# Altium PCB PCB 整版图 AD格式 方便设计底板.PcbDoc
Units mm, origin at the board's own origin, x right, y up, seen from the top; angles counter-clockwise.
Board outline 154.2 x 78.92 mm, 4 copper layers (TopLayer, Signal Layer 1, Signal Layer 2, BottomLayer), stack 0.143 mm thick; 2 components, 158 nets, 96 pads, 0 vias.
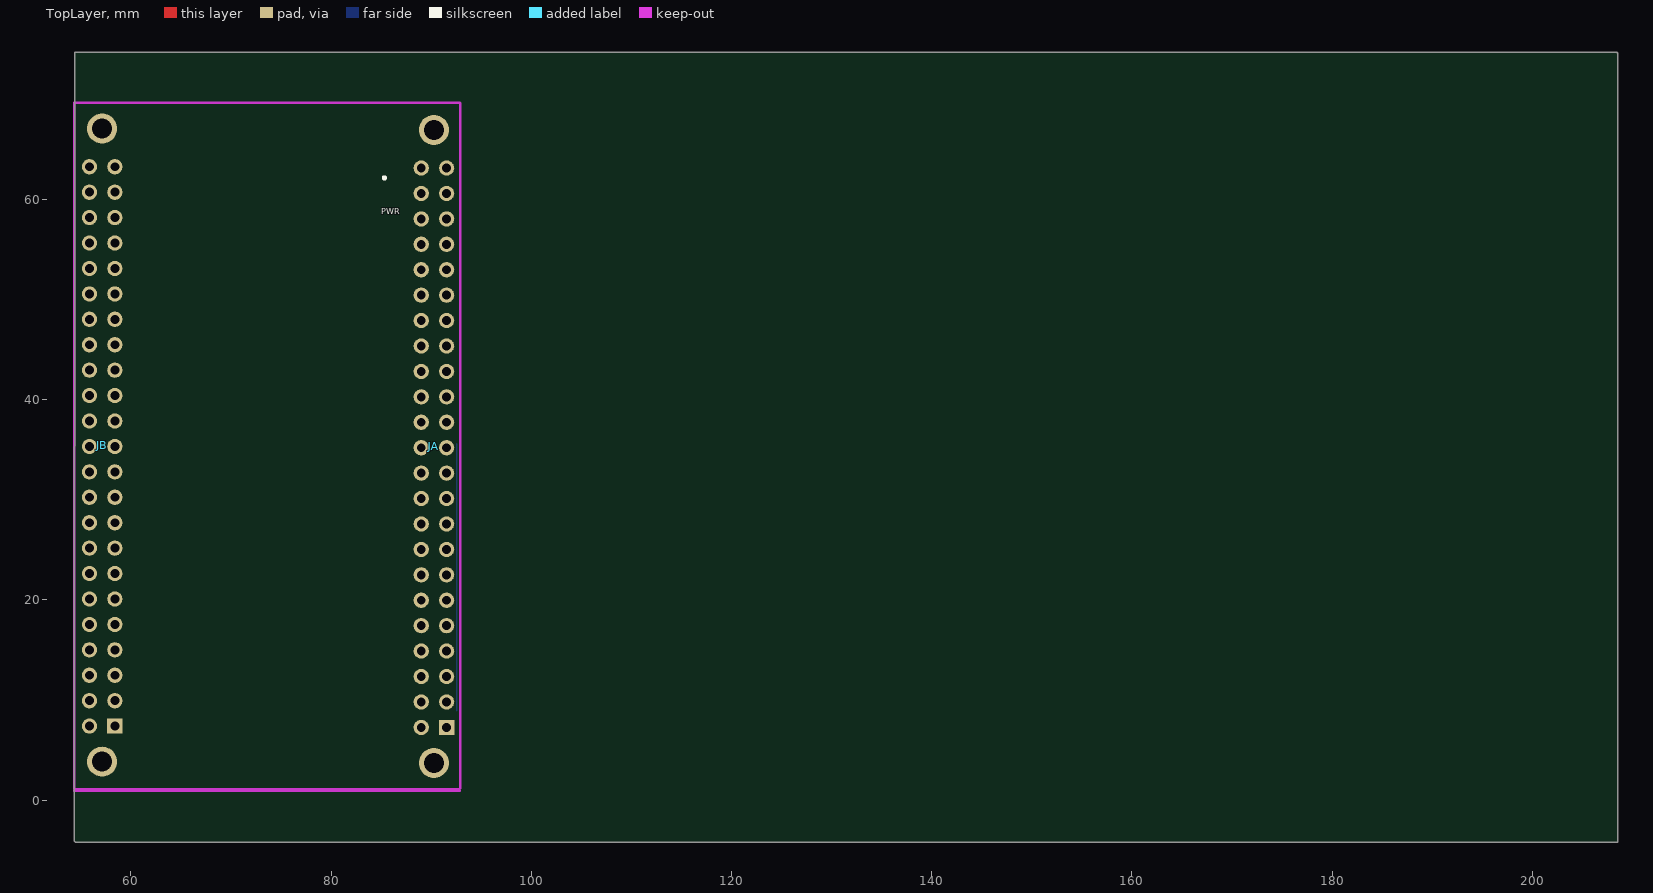
[diagram p0: TopLayer view]
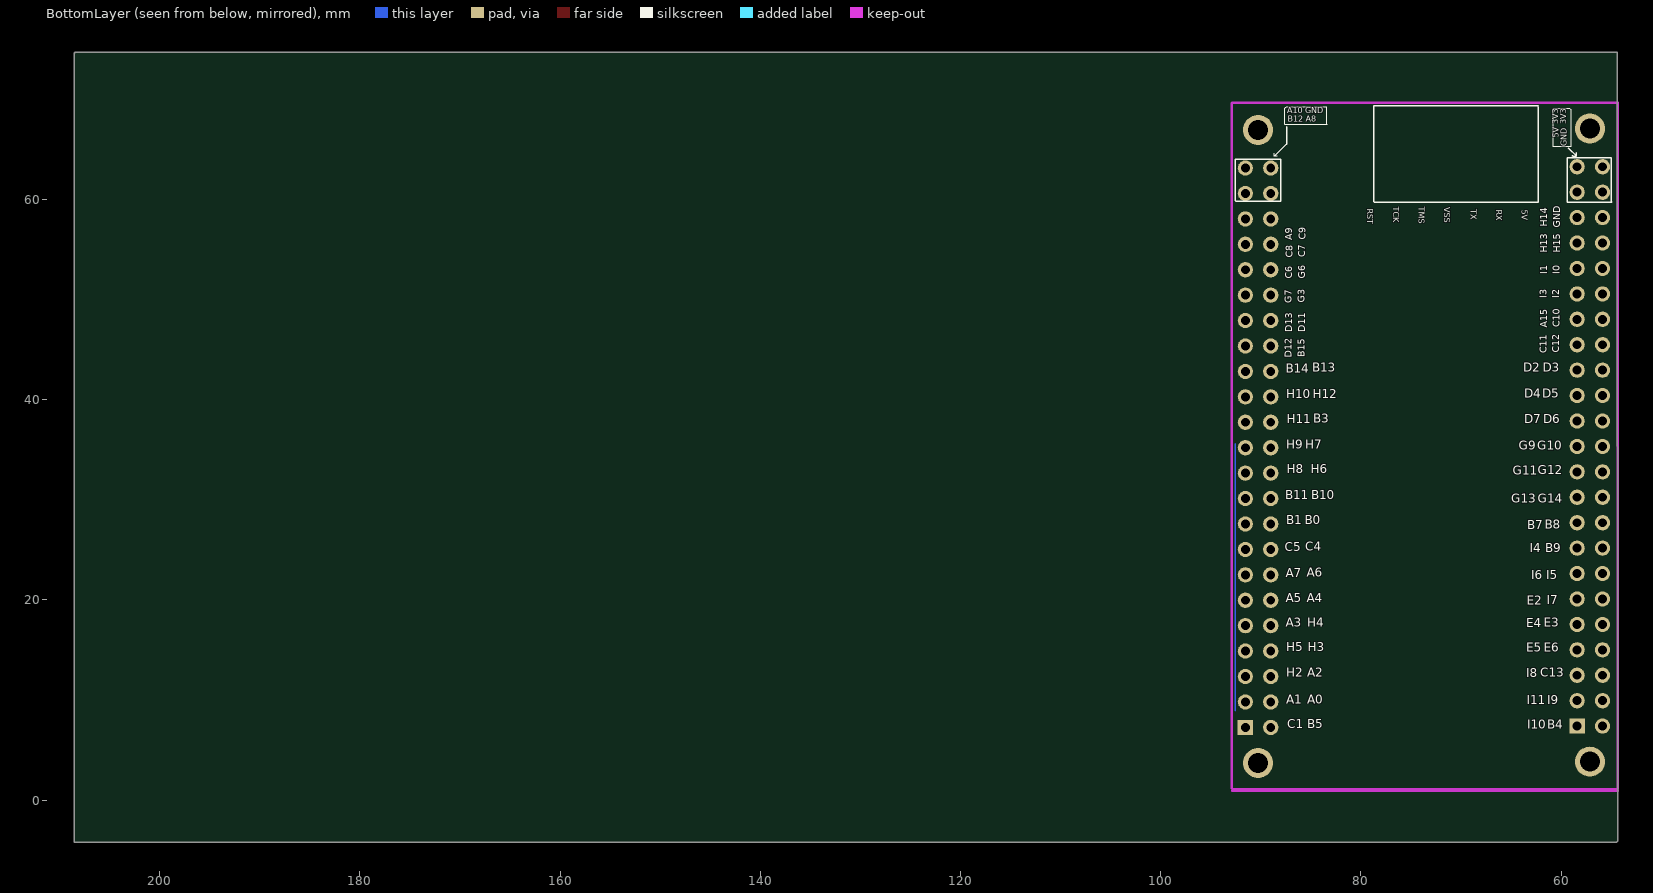
[diagram p1: BottomLayer view, seen from below]

## Layer stack, top to bottom
TopLayer: signal copper 0.0356
Signal Layer 1: signal copper 0.036
Signal Layer 2: signal copper 0.036
BottomLayer: signal copper 0.0356

## Board outline
54.407,74.705 208.429,74.705 208.534,74.6 208.509,74.574 208.509,-4.216 54.462,-4.216 54.335,-4.089

## Design rules (kind name [scope] priority, off if disabled: settings)
Clearance Clearance_1 [All] p1: gap=0.15
ComponentClearance [All] p1 off: gap=0.254 collisioncheckmode=3 verticalgap=0.254 showdistances=FALSE
FabricationTestPointUsage TestPointUsage [All] p1: valid=0 allowmultiple=FALSE
FabricationTestpoint Testpoint [(IsPad And (OnTopLayer Or OnBottomLayer))] p1: side=3 testpointundercomponent=TRUE minsize=1.016 maxsize=2.54 preferedsize=1.524 minholesize=0.508 maxholesize=1.016 preferedholesize=0.813 testpointgrid=0.025 allowsidetop=TRUE allowsidebottom=TRUE usegrid=TRUE gridtolerance=0
MatchedLengths [InNetClass('addres') vs InNetClass('All Nets')] p1: tolerance=5 checknetsindiffpair=TRUE checkdiffpairvsdiffpair=TRUE checkothers=TRUE
PolygonConnect [All] p1: connectstyle=Direct reliefconductorwidth=0.254 reliefentries=4 polygonreliefangle="90 Angle"
RoomDefinition 176v2 [InComponentClass('176v2')] p1: confinementstyle=ConfineIn formatcopy=TRUE lockcomponents=FALSE outline -1158.447,-1371.233 -1107.647,-1371.233 -1107.647,-1345.833 -1158.447,-1345.833
RoutingVias [All] p1: holewidth=0.3 width=0.6 viastyle="Through Hole" minholewidth=0 minwidth=0 maxholewidth=0.711 maxwidth=1.27
SilkscreenOverComponentPads SilkToSolderMaskClearance [IsPad] p1: minsilkscreentomaskgap=0.254
SolderMaskExpansion [All] p1: expansion=0.102
Width [All] p1: maxlimit=1 minlimit=2539.975 preferedwidth=0.3 toplayer_minwidth=0 midlayer1_minwidth=0 midlayer2_minwidth=0 bottomlayer_minwidth=0 minimp=50.000000 maximp=50.000000 favimp=50.000000
24 further rules are at their usual default settings.

## Components (designator, comment, footprint, x,y, rotation, side; value= is the part's Value field where it differs from the comment)
JA "IDC46P" PZ2.54-2X23P#1 91.538,7.257 r90 top locked
JB "IDC46P" PZ2.54-2X23P#2 58.391,7.384 r90 top locked

## Footprints (in the part's own frame and the unit in brackets; to place one, negate y for a bottom-side part, rotate by r counter-clockwise, add the part's x,y. Pads: shape width x height; smd on the part's side, far side on the other; paste and mask are expansions set on the pad)
PZ2.54-2X23P#1 [mil]
  round 118.11 hole 78.74: 0(2349.99,50.01) 0_1(-140,50)
  rect 60x60 hole 35: 1(0,0)
  round 60 hole 35: 2(0.01,100.01) 3(100,0) 4(100.01,100.01) 5(200,0) 6(200.01,100.01) 7(300,0) 8(300.01,100.01) 9(400,0) 10(400.01,100.01) 11(500,0) 12(500.01,100.01) 13(600,0) 14(600.01,100.01) 15(700,0) 16(700.01,100.01) 17(800,0) 18(800.01,100.01) 19(900,0) 20(900.01,100.01) 21(1000,0) 22(1000.01,100.01) 23(1100,0) 24(1100.01,100.01) 25(1200,0) 26(1200.01,100.01) 27(1300,0) 28(1300.01,100.01) 29(1400,0) 30(1400.01,100.01) 31(1500,0) 32(1500.01,100.01) 33(1600,0) 34(1600.01,100.01) 35(1699.99,0) 36(1699.99,100.01) 37(1799.99,0) 38(1799.99,100.01) 39(1899.99,0) 40(1899.99,100.01) 41(1999.99,0) 42(1999.99,100.01) 43(2099.99,0) 44(2099.99,100.01) 45(2199.99,0) 46(2199.99,100.01)
  body extent -50,-50 2264,150, height 336
PZ2.54-2X23P#2 [mil]
  round 118.11 hole 78.74: 0(-140,50) 0_1(2349.99,50.01)
  rect 60x60 hole 35: 1(0,0)
  round 60 hole 35: 2(0.01,100.01) 3(100,0) 4(100.01,100.01) 5(200,0) 6(200.01,100.01) 7(300,0) 8(300.01,100.01) 9(400,0) 10(400.01,100.01) 11(500,0) 12(500.01,100.01) 13(600,0) 14(600.01,100.01) 15(700,0) 16(700.01,100.01) 17(800,0) 18(800.01,100.01) 19(900,0) 20(900.01,100.01) 21(1000,0) 22(1000.01,100.01) 23(1100,0) 24(1100.01,100.01) 25(1200,0) 26(1200.01,100.01) 27(1300,0) 28(1300.01,100.01) 29(1400,0) 30(1400.01,100.01) 31(1500,0) 32(1500.01,100.01) 33(1600,0) 34(1600.01,100.01) 35(1699.99,0) 36(1699.99,100.01) 37(1799.99,0) 38(1799.99,100.01) 39(1899.99,0) 40(1899.99,100.01) 41(1999.99,0) 42(1999.99,100.01) 43(2099.99,0) 44(2099.99,100.01) 45(2199.99,0) 46(2199.99,100.01)
  body extent -50,-50 2264,150, height 336

## Nets (pads, with @x,y where several pads share a name; then routed paths per layer and width w, separated by ;. In a path a pad name is that pad's centre, name@x,y a point inside that pad or via, vN(x,y) a via of type N, cw(c..) or ccw(c..) an arc to the next point about the centre after c; other vN are vias at no path point)
3.3V: 
5V: 
5VIN: 
A0: 
A1: 
A2: 
A3: 
A4: 
A5: 
A6: 
A7: 
A8: 
A9: 
A10: 
A11: 
A12: 
B3: 
B4: 
B5: 
B6: 
B7: 
BA0: 
BA1: 
BAT+: 
BL0: 
BL1: 
BOOT0: 
CAS: 
CD: 
CKE: 
CLK: 
CS: 
CS1: 
D0: 
D1: 
D2: 
D3: 
D4: 
D5: 
D6: 
D7: 
D8: 
D9: 
D10: 
D11: 
D12: 
D13: 
D14: 
D15: 
DCMI_D0: 
DCMI_D1: 
DCMI_D2: 
DCMI_D3: 
DCMI_D4: 
DCMI_D5: 
DCMI_D6: 
DCMI_D7: 
DCMI_HREF: 
DCMI_PCK: 
DCMI_PWDN: 
DCMI_SCL: 
DCMI_SDA: 
DCMI_VSY: 
DM: 
DP: 
G2: 
G3: 
G4: 
G5: 
G6: 
G7: 
GND: 
JTCK: 
JTMS: 
"L BL": 
"L CLK": 
"L DE": 
"L HS": 
"L VS": 
LCD-BL: 
LCD-CS: 
LCD-DC: 
LCD-SCL-SCK: 
LCD-SDA-MOSI: 
LEDEN: 
MISO: 
MOSI: 
NetC21A_2: 
NetC24_1: 
NetC25_1: 
NetC26_1: 
NetC27_1: 
NetC27A_1: 
NetD1_1: 
NetLED3_1: 
NetLED_1: 
NetQ1_1: 
NetQ2_3: 
NetR7_2: 
NetR15_2: 
PA0: 
PA1: 
PA2: 
PA3: 
PA7: 
PA8: 
PA9: 
PA10: 
PA15: 
PB0: 
PB1: 
PB2: 
PB6: 
PB10: 
PB11: 
PB14: 
PC0: 
PC1: 
PC4: 
PC5: 
PC10: 
PC12: 
PC13: 
PC15: 
PD2: 
PD4: 
PD5: 
PD6: 
PD7: 
PD11: 
PD12: 
PD13: 
PE2: 
PE3: 
PE4: 
PE5: 
PE6: 
PF7: 
PF11: 
PG3: 
PG6: 
PG9: 
PG10: 
PG13: 
PH3: 
PH4: 
PH5: 
PH6: 
PH7: 
PH9: 
PH10: 
PH11: 
PH12: 
PI3: 
PI4: 
PI8: 
PI11: 
RST: 
pads on no net: JA.0 JA.0_1 JA.1 JA.2 JA.3 JA.4 JA.5 JA.6 JA.7 JA.8 JA.9 JA.10 JA.11 JA.12 JA.13 JA.14 JA.15 JA.16 JA.17 JA.18 JA.19 JA.20 JA.21 JA.22 JA.23 JA.24 JA.25 JA.26 JA.27 JA.28 JA.29 JA.30 JA.31 JA.32 JA.33 JA.34 JA.35 JA.36 JA.37 JA.38 JA.39 JA.40 JA.41 JA.42 JA.43 JA.44 JA.45 JA.46 JB.0 JB.0_1 JB.1 JB.2 JB.3 JB.4 JB.5 JB.6 JB.7 JB.8 JB.9 JB.10 JB.11 JB.12 JB.13 JB.14 JB.15 JB.16 JB.17 JB.18 JB.19 JB.20 JB.21 JB.22 JB.23 JB.24 JB.25 JB.26 JB.27 JB.28 JB.29 JB.30 JB.31 JB.32 JB.33 JB.34 JB.35 JB.36 JB.37 JB.38 JB.39 JB.40 JB.41 JB.42 JB.43 JB.44 JB.45 JB.46
copper on no net: | length 26.7
  BottomLayer w0.15: 92.525,8.929 92.525,35.606

## Keep-outs
KeepOutLayer:
  lines w0.1: 92.862,1.114 92.862,69.668 ; 92.862,1.118 92.862,69.672
  lines w0.127: 54.352,42.646 54.352,69.646 ; 92.909,42.646 92.909,69.646
  lines w0.2: 54.335,0.889 92.835,0.889 ; 54.335,0.94 92.862,0.94 ; 54.335,1.121 54.335,69.621 92.835,69.621 ; 54.335,69.588 54.335,1.114 92.862,1.114 ; 54.335,69.592 54.335,1.118 ; 54.335,69.672 92.835,69.672 ; 54.356,0.889 92.856,0.889 ; 54.356,0.914 92.856,0.914 ; 54.356,0.944 92.856,0.944 ; 54.356,1.143 54.356,69.643 92.856,69.643 ; 54.356,1.147 54.356,69.647 92.856,69.647 ; 54.356,69.698 92.856,69.698 ; 92.835,69.618 54.335,69.618 54.335,1.118 ; 92.862,1.118 54.335,1.118 ; 92.892,1.114 92.892,69.588 ; 92.892,69.618 92.892,1.118 ; 92.913,1.143 92.913,69.643 ; 92.892,1.118 92.892,69.592 92.892,1.118 ; 92.892,1.121 92.892,69.621 92.892,1.121 ; 92.913,1.147 92.913,69.647 92.913,1.147

## Silkscreen, mask and mechanical layers (free items; w line width, h text height)
TopOverlay:
  circle w0.254: c85.319,62.154 r0.13
  text "PWR" at 84.988,58.315 h1
BottomOverlay:
  lines w0.1: 58.979,68.957 58.979,65.274 60.782,65.274 60.782,69.084 59.131,69.084 59.004,68.957 59.004,68.932 ; 83.388,69.211 83.388,67.509 83.414,67.484 87.528,67.484 87.579,67.535 87.579,69.11 ; 83.414,69.211 87.478,69.211 87.579,69.11 ; 87.427,67.281 87.427,65.579 88.621,64.385 ; 87.554,69.135 87.579,69.11 ; 88.341,64.309 88.595,64.309 88.621,64.334 88.646,64.334 88.646,64.614 ; 87.986,59.864 87.986,63.699 87.986,64.03 92.558,64.03 92.532,64.004 92.532,59.864 92.507,59.839 88.011,59.839 87.986,59.864
  lines w0.15: 54.94,59.712 54.966,59.737 54.966,64.182 54.991,64.157 59.36,64.157 59.36,59.712 55.016,59.712 ; 58.471,64.665 58.471,64.334 ; 58.877,64.36 58.852,64.334 58.471,64.334 ; 59.258,65.122 58.471,64.334 ; 62.255,69.342 78.689,69.342 78.689,59.766 78.638,59.715 62.281,59.715 ; 62.281,59.766 62.281,69.266 ; 87.427,67.281 87.427,65.528 88.57,64.385 88.57,64.36 ; 87.986,64.03 92.507,64.03 92.532,64.004 92.532,59.889 92.481,59.839 88.011,59.839 87.986,59.813 87.986,63.903 88.011,63.928 88.011,64.004
  text "A10" at 87.357,68.43 h1
  text "GND" at 85.549,68.405 h1
  text "A8" at 85.523,67.567 h1
  text "B12" at 87.301,67.567 h1
  text "3V3" at 59.265,67.533 h1 r270
  text "3V3" at 60.078,67.533 h1 r270
  text "5V" at 60.027,66.162 h1 r270
  text "GND" at 59.24,65.298 h1 r270
  text "TCK" at 76.987,59.28 h1 r90
  text "TMS" at 74.397,59.254 h1 r90
  text "VSS" at 71.857,59.229 h1 r90
  text "RST" at 79.553,59.077 h1 r90
  text "TX" at 69.215,59.026 h1 r90
  text "5V" at 64.11,58.975 h1 r90
  text "RX" at 66.675,58.975 h1 r90
  text "H14" at 61.119,57.272 h1.2 r270
  text "GND" at 59.849,57.195 h1.2 r270
  text "C9" at 85.249,55.976 h1.2 r270
  text "A9" at 86.596,55.9 h1.2 r270
  text "H15" at 59.849,54.681 h1.2 r270
  text "H13" at 61.119,54.655 h1.2 r270
  text "C7" at 85.3,54.224 h1.2 r270
  text "C8" at 86.57,54.198 h1.2 r270
  text "I0" at 59.875,52.547 h1.2 r270
  text "I1" at 61.145,52.522 h1.2 r270
  text "G6" at 85.326,52.09 h1.2 r270
  text "C6" at 86.596,52.065 h1.2 r270
  text "I2" at 59.926,50.134 h1.2 r270
  text "I3" at 61.196,50.109 h1.2 r270
  text "G3" at 85.376,49.677 h1.2 r270
  text "G7" at 86.646,49.652 h1.2 r270
  text "C10" at 59.875,47.213 h1.2 r270
  text "A15" at 61.145,47.188 h1.2 r270
  text "D11" at 85.326,46.756 h1.2 r270
  text "D13" at 86.596,46.731 h1.2 r270
  text "C12" at 59.926,44.673 h1.2 r270
  text "C11" at 61.196,44.648 h1.2 r270
  text "B15" at 85.376,44.216 h1.2 r270
  text "D12" at 86.646,44.191 h1.2 r270
  text "D2" at 63.756,42.486 h1.5
  text "D3" at 61.849,42.461 h1.5
  text "B13" at 84.836,42.461 h1.5
  text "B14" at 87.505,42.41 h1.5
  text "D5" at 61.901,39.896 h1.5
  text "D4" at 63.679,39.87 h1.5
  text "H12" at 84.787,39.845 h1.5
  text "H10" at 87.454,39.819 h1.5
  text "B3" at 84.761,37.381 h1.5
  text "H11" at 87.403,37.356 h1.5
  text "D6" at 61.8,37.33 h1.5
  text "D7" at 63.679,37.33 h1.5
  text "H7" at 85.574,34.79 h1.5
  text "H9" at 87.428,34.776 h1.5
  text "G10" at 62.384,34.714 h1.5
  text "G9" at 64.238,34.7 h1.5
  text "H6" at 85.015,32.352 h1.5
  text "H8" at 87.427,32.352 h1.5
  text "G12" at 62.333,32.225 h1.5
  text "G11" at 64.846,32.174 h1.5
  text "B10" at 84.939,29.736 h1.5
  text "B11" at 87.555,29.736 h1.5
  text "G14" at 62.333,29.405 h1.5
  text "G13" at 64.975,29.38 h1.5
  text "B0" at 85.6,27.246 h1.5
  text "B1" at 87.454,27.246 h1.5
  text "B8" at 61.622,26.789 h1.5
  text "B7" at 63.4,26.738 h1.5
  text "C4" at 85.574,24.592 h1.5
  text "C5" at 87.583,24.533 h1.5
  text "B9" at 61.597,24.465 h1.5
  text "I4" at 63.123,24.431 h1.5
  text "A6" at 85.396,22.002 h1.5
  text "A7" at 87.479,21.976 h1.5
  text "I5" at 61.47,21.773 h1.5
  text "I6" at 62.994,21.773 h1.5
  text "A4" at 85.396,19.474 h1.5
  text "A5" at 87.479,19.449 h1.5
  text "I7" at 61.419,19.245 h1.5
  text "E2" at 63.425,19.22 h1.5
  text "A3" at 87.479,17.036 h1.5
  text "E3" at 61.724,17.01 h1.5
  text "H4" at 85.346,17.01 h1.5
  text "E4" at 63.502,16.985 h1.5
  text "H3" at 85.295,14.583 h1.5
  text "H5" at 87.454,14.583 h1.5
  text "E6" at 61.724,14.532 h1.5
  text "E5" at 63.476,14.532 h1.5
  text "C13" at 62.078,12.006 h1.5
  text "A2" at 85.344,12.006 h1.5
  text "H2" at 87.452,12.006 h1.5
  text "I8" at 63.475,11.956 h1.5
  text "A0" at 85.371,9.314 h1.5
  text "A1" at 87.428,9.314 h1.5
  text "I9" at 61.393,9.263 h1.5
  text "I11" at 63.451,9.263 h1.5
  text "B5" at 85.371,6.85 h1.5
  text "C1" at 87.378,6.85 h1.5
  text "B4" at 61.393,6.799 h1.5
  text "I10" at 63.4,6.799 h1.5